# Altium PCB TCRT 16 (PCB2).PcbDoc
Units mm, origin at the board's own origin, x right, y up, seen from the top; angles counter-clockwise.
Board outline 124.42 x 92.49 mm, 2 copper layers (Top Layer, Bottom Layer); 56 components, 44 nets, 238 pads, 27 vias.
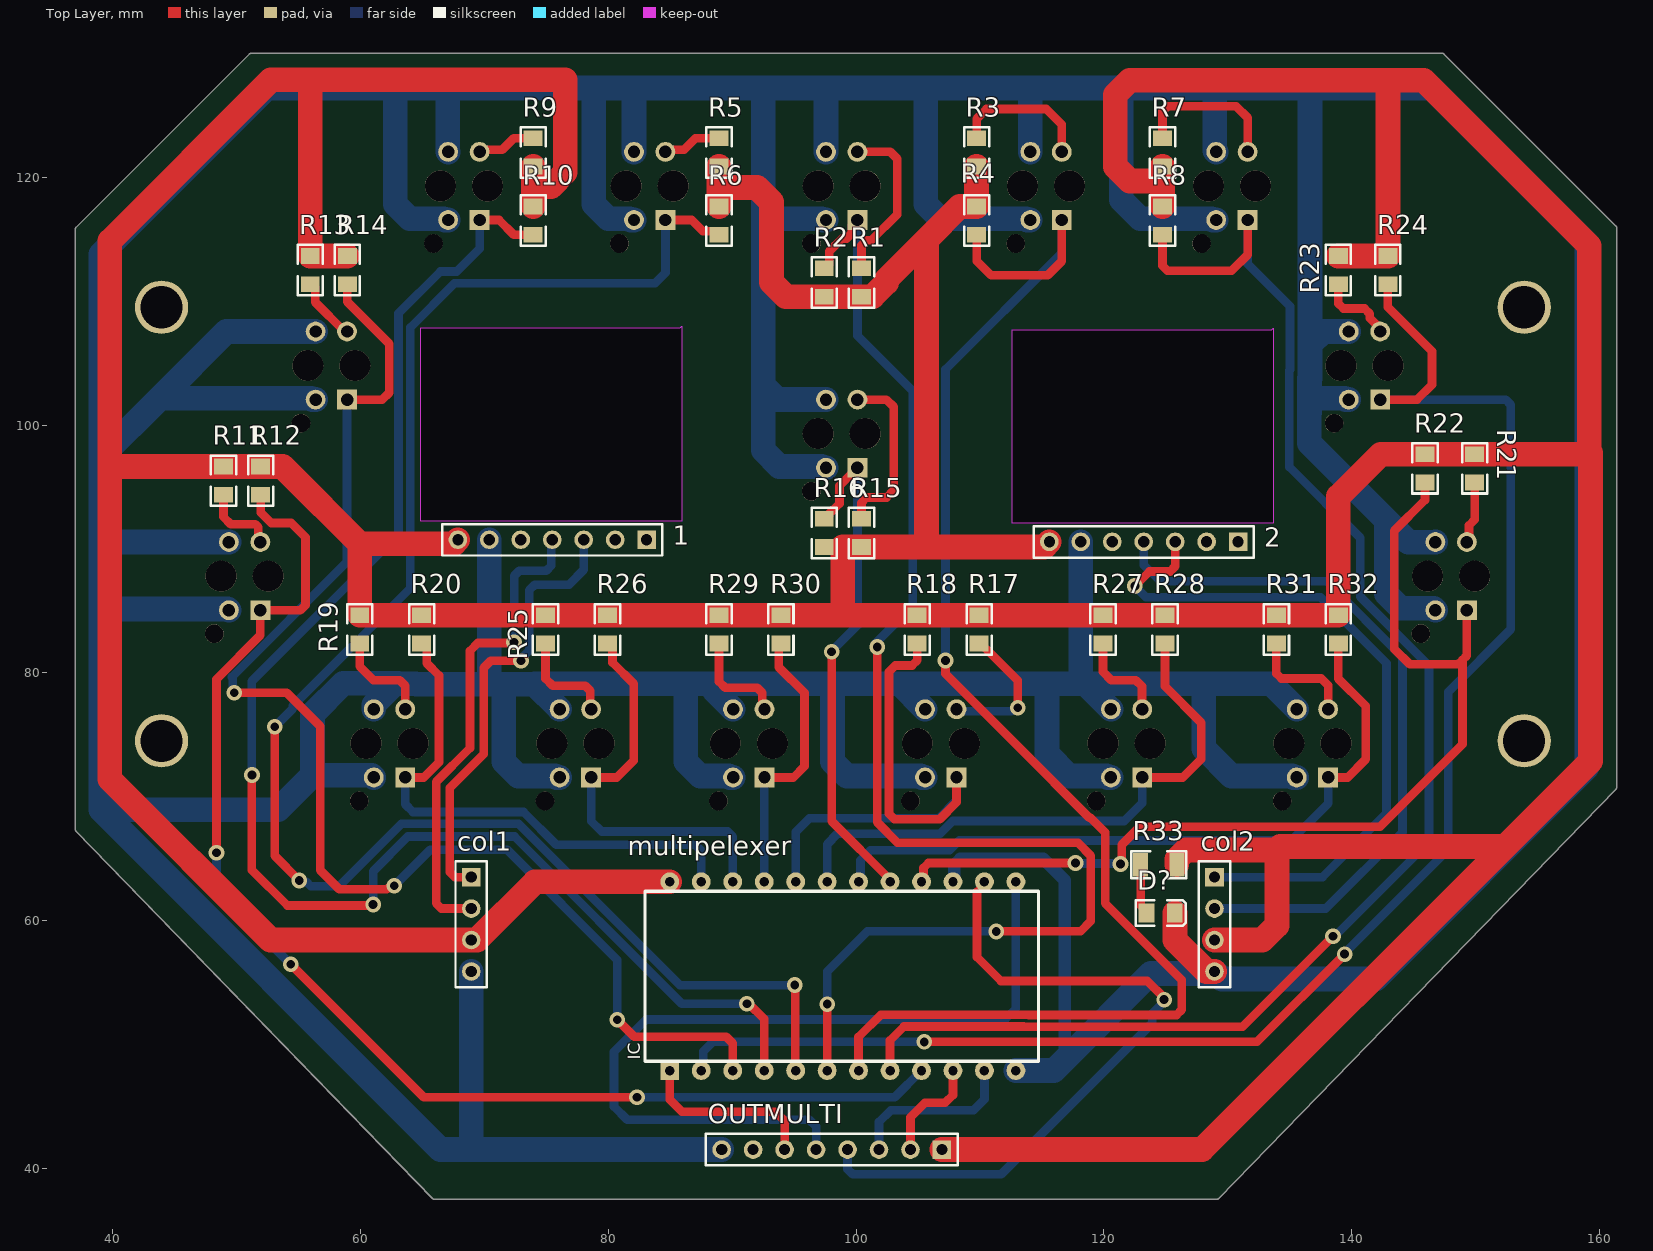
[diagram p0: Top Layer view]
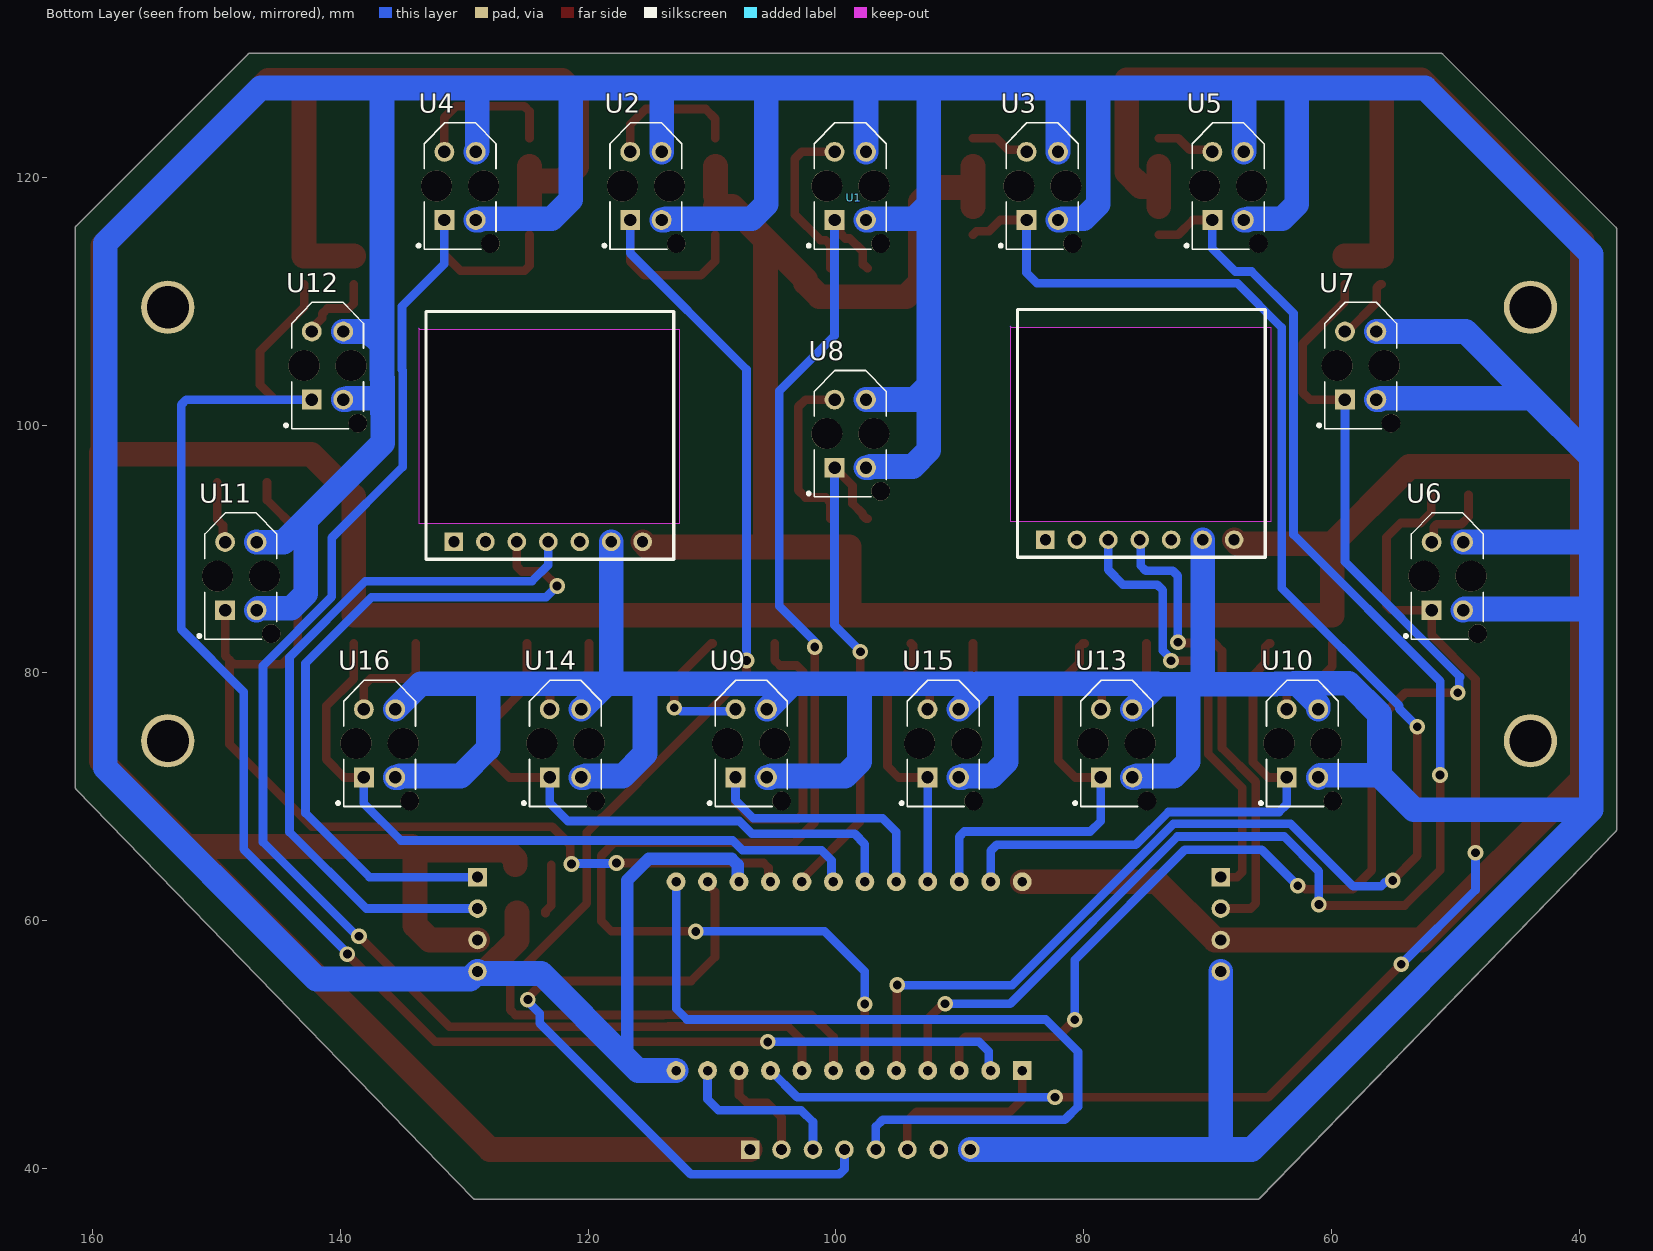
[diagram p1: Bottom Layer view, seen from below]
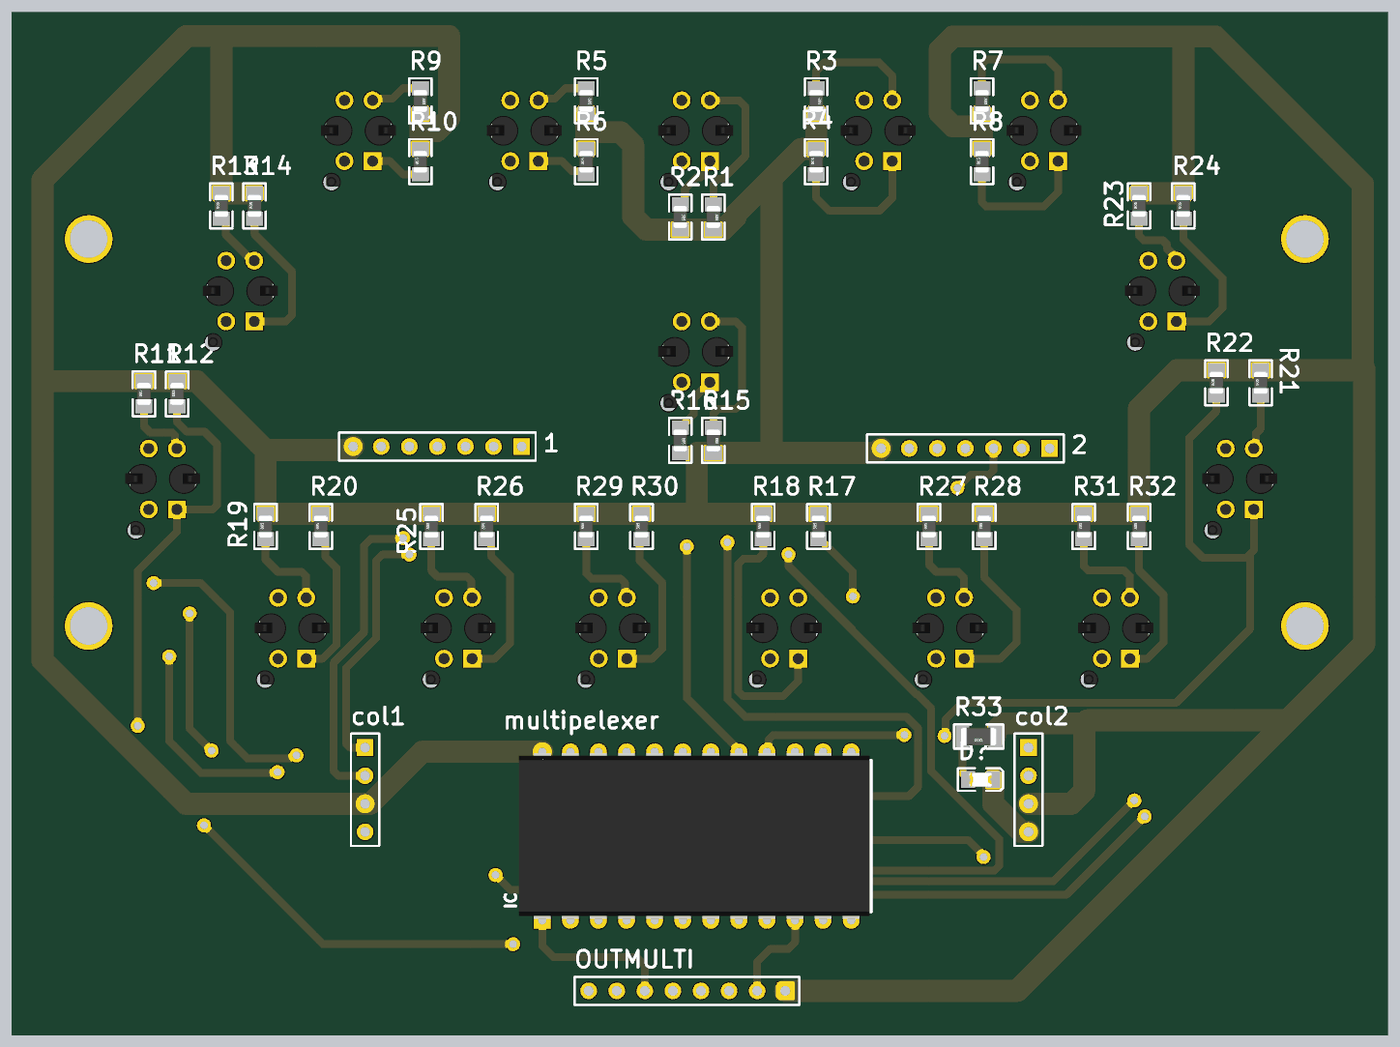
[diagram p2: 3D render of the assembled board from above, using the file's embedded part models]
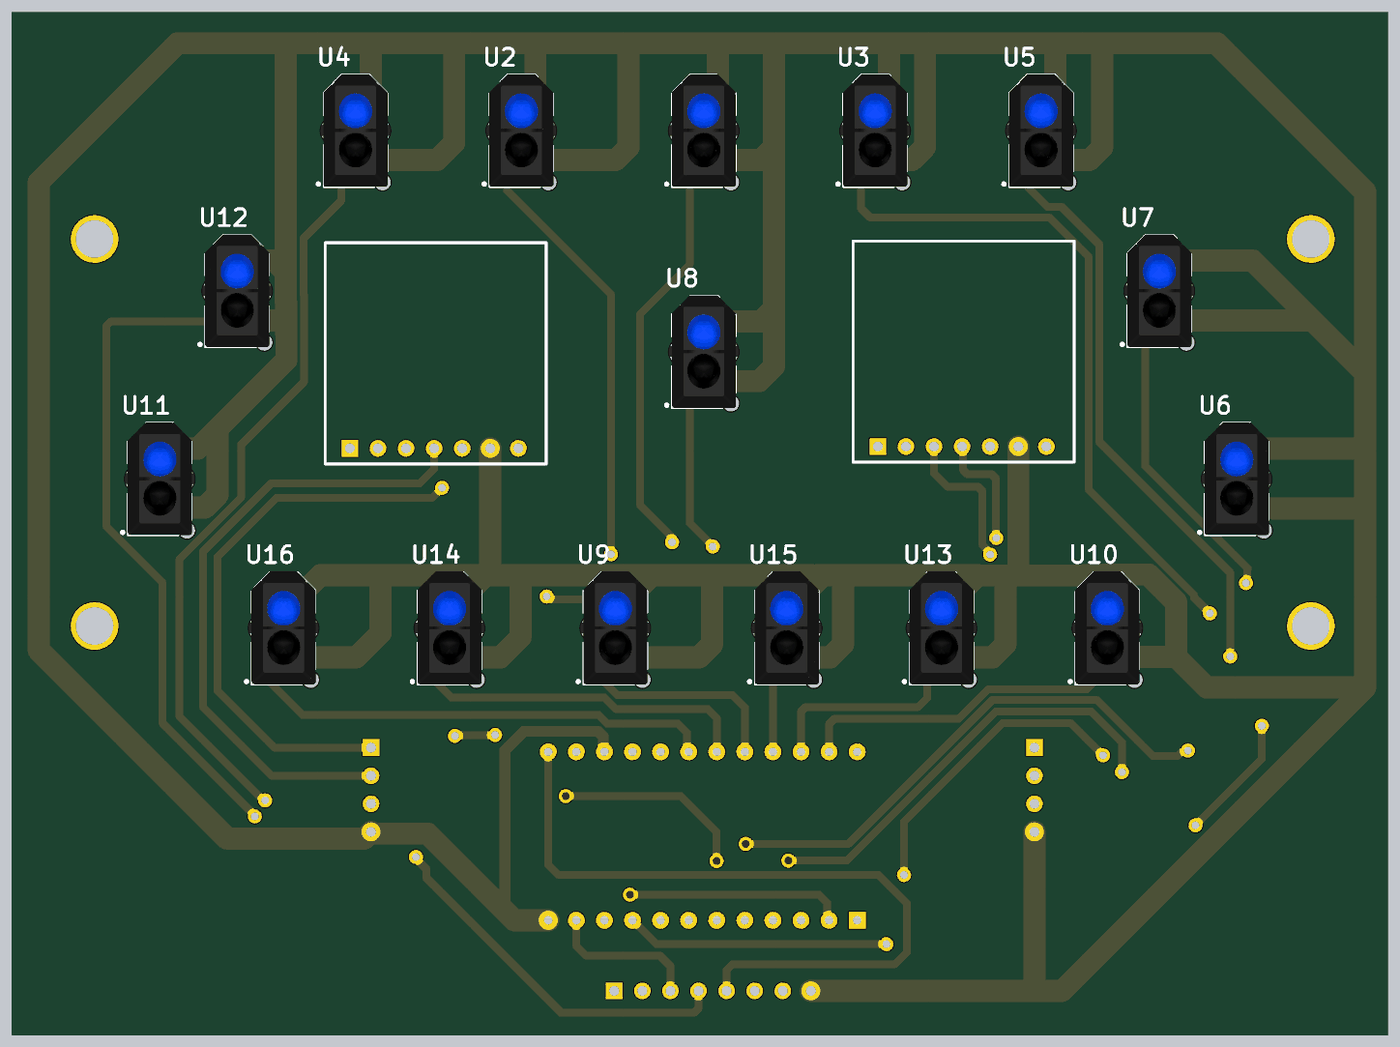
[diagram p3: 3D render of the assembled board from below, using the file's embedded part models]

## Layer stack, top to bottom
Top Solder: solder mask 0.0102, Solder Resist, Dk 3.5
Top Layer: signal copper 0.0356
Dielectric 1: dielectric 0.32, FR-4, Dk 4.8
Bottom Layer: signal copper 0.0356
Bottom Solder: solder mask 0.0102, Solder Resist, Dk 3.5

## Board outline
37.015,67.234 cw(c37.107,67.323) 36.979,67.323 36.979,115.865 cw(c37.107,115.865) 37.017,115.955 51.026,129.964 cw(c51.116,129.874) 51.116,130.002 147.356,130.002 cw(c147.356,129.874) 147.447,129.964 161.357,116.054 161.357,116.053 161.357,116.054 cw(c161.267,115.963) 161.395,115.963 161.395,70.717 cw(c161.267,70.717) 161.359,70.629 129.25,37.547 cw(c129.159,37.635) 129.159,37.508 65.921,37.508 cw(c65.921,37.635) 65.83,37.547
cut-out: 112.602,92.075 112.602,107.696 133.557,107.696 133.684,107.823 133.684,92.075
cut-out: 64.853,92.239 64.853,107.86 85.808,107.86 85.935,107.987 85.935,92.239

## Design rules (kind name [scope] priority, off if disabled: settings)
Clearance [All] p1: gap=0.254 ignorepadtopadclearanceinfootprint=FALSE except(0: Arc-Hole Track-Hole SMDPad-Hole THPad-Hole Via-Hole Fill-Hole Poly-Hole Region-Hole Text-Hole)
PolygonConnect [All] p1: connectstyle=Relief reliefconductorwidth=0.254 reliefentries=4 polygonreliefangle="90 Angle" airgapwidth=0.254
RoutingVias [All] p1: holewidth=0.711 width=1.27 viastyle="Through Hole" minholewidth=0.711 minwidth=1.27 maxholewidth=0.711 maxwidth=1.27
SolderMaskExpansion [All] p1: expansion=0.102 istentingtop=FALSE
Width "Schematic Width Constraint_1" [InNet('VCC')] p1: maxlimit=2 minlimit=2 preferedwidth=2
Width "Schematic Width Constraint" [InNet('GND')] p2: maxlimit=2 minlimit=1 preferedwidth=2 minimp=50.000000 maximp=50.000000 favimp=50.000000
Width [All] p3: maxlimit=0.7 minlimit=0.7 preferedwidth=0.7 minimp=50.000000 maximp=50.000000 favimp=50.000000
30 further rules are at their usual default settings.

## Components (designator, comment, footprint, x,y, rotation, side; value= is the part's Value field where it differs from the comment)
1 "Header 7" HDR1X7 83.093,90.739 r180 top locked
2 "Header 7" HDR1X7 130.842,90.575 r180 top locked
col1 "Header 4" HDR1X4 68.933,63.507 r270 top
col2 "Header 4" HDR1X4 128.933,63.507 r270 top
D? "LED-SMD(0805)" "0805 LED" 124.593,60.613 r0 top
multipelexer "BC4067BE_*" PCBComponent_1 98.933,55.507 r90 top
OUTMULTI "Header 8" HDR1X8 106.933,41.507 r180 top
R1 "150" 0805 100.433,111.507 r270 top
R2 "10K" 0805 97.433,111.507 r270 top
R3 "150" 0805 109.733,122.007 r270 top
R4 "10K" 0805 109.733,116.507 r90 top
R5 "150" 0805 88.933,122.007 r270 top
R6 "10K" 0805 88.933,116.507 r90 top
R7 "150" 0805 124.733,122.007 r270 top
R8 "10K" 0805 124.733,116.507 r90 top
R9 "150" 0805 73.933,122.007 r270 top
R10 "10K" 0805 73.933,116.507 r90 top
R11 "150" 0805 48.933,95.507 r90 top
R12 "10K" 0805 51.933,95.507 r90 top
R13 "150" 0805 55.933,112.507 r90 top
R14 "10K" 0805 58.933,112.507 r90 top
R15 "150" 0805 100.433,91.296 r270 top
R16 "10K" 0805 97.433,91.296 r270 top
R17 "150" 0805 109.933,83.507 r90 top
R18 "10K" 0805 104.933,83.507 r90 top
R19 "150" 0805 59.933,83.507 r90 top
R20 "10K" 0805 64.933,83.507 r90 top
R21 "150" 0805 149.933,96.507 r90 top
R22 "10K" 0805 145.933,96.507 r90 top
R23 "150" 0805 138.933,112.507 r90 top
R24 "10K" 0805 142.933,112.507 r90 top
R25 "150" 0805 74.933,83.507 r90 top
R26 "10K" 0805 79.933,83.507 r90 top
R27 "150" 0805 119.933,83.507 r90 top
R28 "10K" 0805 124.933,83.507 r90 top
R29 "150" 0805 88.933,83.507 r90 top
R30 "10K" 0805 93.933,83.507 r90 top
R31 "150" 0805 133.933,83.507 r90 top
R32 "10K" 0805 138.933,83.507 r90 top
R33 "150" 1206 124.433,64.507 r180 top
U1 "TCRT500" TCRT5000 98.433,119.507 r90 bottom locked
U2 "TCRT500" TCRT5000 114.933,119.507 r90 bottom
U3 "TCRT500" TCRT5000 82.933,119.507 r90 bottom
U4 "TCRT500" TCRT5000 129.933,119.507 r90 bottom
U5 "TCRT500" TCRT5000 67.933,119.507 r90 bottom
U6 "TCRT500" TCRT5000 50.233,88.007 r90 bottom
U7 "TCRT500" TCRT5000 57.233,105.007 r90 bottom
U8 "TCRT500" TCRT5000 98.433,99.507 r90 bottom locked
U9 "TCRT500" TCRT5000 106.433,74.507 r90 bottom
U10 "TCRT500" TCRT5000 61.933,74.507 r90 bottom
U11 "TCRT500" TCRT5000 147.633,88.007 r90 bottom
U12 "TCRT500" TCRT5000 140.633,105.007 r90 bottom
U13 "TCRT500" TCRT5000 76.933,74.507 r90 bottom
U14 "TCRT500" TCRT5000 121.433,74.507 r90 bottom
U15 "TCRT500" TCRT5000 90.933,74.507 r90 bottom
U16 "TCRT500" TCRT5000 136.433,74.507 r90 bottom

## Footprints (in the part's own frame and the unit in brackets; to place one, negate y for a bottom-side part, rotate by r counter-clockwise, add the part's x,y. Pads: shape width x height; smd on the part's side, far side on the other; paste and mask are expansions set on the pad)
0805 [mil]
  rect 50x60 smd: 1(-45,0) 2(45,0)
  silkscreen extent -80,-40 80,40, body extent -39,-25 39,25, height 31
"0805 LED" [mil]
  rect 50x60 smd: 1(-45,0) 2(45,0)
  silkscreen extent -80,-40 80,40, body extent -39,-25 39,25, height 32
1206 [mm]
  rect 1.2x1.9 smd: 1(-1.46,0) 2(1.46,0)
  silkscreen extent -2.22,-1.09 2.22,1.09, body extent -1.59,-0.8 1.61,0.8, height 1
HDR1X4 [mm] "Connector; Header; 4 Position"
  rect 1.5x1.5 hole 0.9: 1(0,0)
  round 1.5 hole 0.9: 2(2.54,0) 3(5.08,0) 4(7.62,0)
  silkscreen extent -1.27,-1.27 8.89,1.27
HDR1X7 [mm] "Connector; Header; 7 Position"
  rect 1.5x1.5 hole 0.9: 1(0,0)
  round 1.5 hole 0.9: 2(2.54,0) 3(5.08,0) 4(7.62,0) 5(10.16,0) 6(12.7,0) 7(15.24,0)
  silkscreen extent -1.27,-1.27 16.51,1.27
HDR1X8 [mm] "Connector; Header; 8 Position"
  rect 1.5x1.5 hole 0.9: 1(0,0)
  round 1.5 hole 0.9: 2(2.54,0) 3(5.08,0) 4(7.62,0) 5(10.16,0) 6(12.7,0) 7(15.24,0) 8(17.78,0)
  silkscreen extent -1.27,-1.27 19.05,1.27
PCBComponent_1 [mil]
  rect 60x60 hole 30 paste+0: 1(-300,550)
  round 60 hole 30 paste+0: 2(-300,450) 3(-300,350) 4(-300,250) 5(-300,150) 6(-300,50) 7(-300,-50) 8(-300,-150) 9(-300,-250) 10(-300,-350) 11(-300,-450) 12(-300,-550) 13(300,-550) 14(300,-450) 15(300,-350) 16(300,-250) 17(300,-150) 18(300,-50) 19(300,50) 20(300,150) 21(300,250) 22(300,350) 23(300,450) 24(300,550)
  silkscreen extent -270,-621 270,629, body extent -295,-616 296,634, height 36
TCRT5000 [mm]
  round 1.6 hole 1: A(2.547,1.676) E(-2.953,-0.864) K(2.547,-0.864)
  rect 1.6x1.6 hole 1: C(-2.953,1.676)
  round 1.5 hole 1.5 unplated: None(-4.853,-2.044)
  round 2.5 hole 2.5 unplated: None(-0.203,-1.494) None(-0.203,2.306)
  silkscreen extent -5.3,-2.49 4.9,3.88, body extent -5.28,-3 4.92,3.8, height 7.2

## Part data
1 2: "Header, 7-Pin", LatestRevisionDate=17-Jul-2002, LatestRevisionNote="Re-released for DXP Platform.", Publisher="Altium Limited"
col1 col2: "Header, 4-Pin", LatestRevisionDate=17-Jul-2002, LatestRevisionNote="Re-released for DXP Platform.", Publisher="Altium Limited"
OUTMULTI: "Header, 8-Pin", LatestRevisionDate=17-Jul-2002, LatestRevisionNote="Re-released for DXP Platform.", Publisher="Altium Limited"
R1 R2 R3 R4 R5 R6 R7 R8 R9 R10 R11 R12 R13 R14 R15 R16 R17 R18 R19 R20 R21 R22 R23 R24 R25 R26 R27 R28 R29 R30 R31 R32 R33: library part RESISTOR_SMD, "Choose your Favorite size from Footprint Section"
U1 U2 U3 U4 U5 U6 U7 U8 U9 U10 U11 U12 U13 U14 U15 U16: library part TCRT5000

## Free pads (board coordinates)
  round 4.3 hole 3.4: 20(43.933,74.507) 20(43.933,109.507) 20(153.933,74.507) 20(153.933,109.507)

## Via types
v1: diameter 1.27, hole 0.711, Top Layer to Bottom Layer, 27 vias

## Nets (pads, with @x,y where several pads share a name; then routed paths per layer and width w, separated by ;. In a path a pad name is that pad's centre, name@x,y a point inside that pad or via, vN(x,y) a via of type N, cw(c..) or ccw(c..) an arc to the next point about the centre after c; other vN are vias at no path point)
A: multipelexer.10 OUTMULTI.2 | length 8.7
  Top Layer w0.7: OUTMULTI.2 104.393,44.111 105.568,45.286 107.187,45.286 107.823,45.922 multipelexer.10
B: multipelexer.11 OUTMULTI.3 | length 13.8
  Bottom Layer w0.7: OUTMULTI.3 101.853,43.736 102.812,44.695 109.482,44.695 110.363,45.576 multipelexer.11
C: multipelexer.14 OUTMULTI.4 | length 56.6
  Top Layer w0.7: multipelexer.14 110.363,62.904 109.764,62.305 109.764,57.054 111.692,55.127 123.504,55.127 124.869,53.761 v1(124.869,53.614)
  Bottom Layer w0.7: OUTMULTI.4 99.313,39.926 99.723,39.516 111.723,39.516 123.906,51.7 123.906,52.496 124.869,53.46 v1(124.869,53.614)
D: multipelexer.13 OUTMULTI.5 | length 67.4
  Bottom Layer w0.7: OUTMULTI.5 96.773,43.372 96.221,43.924 81.526,43.924 80.459,44.991 80.459,49.404 83.067,52.012 112.02,52.012 112.903,52.895 multipelexer.13
GND: 1.6 2.6 col1.4 col2.4 D?.2 multipelexer.12 multipelexer.15 OUTMULTI.8 U1.E U1.K U2.E U2.K U3.E U3.K U4.E U4.K U5.E U5.K U6.E U6.K U7.E U7.K U8.E U8.K U9.E U9.K U10.E U10.K U11.E U11.K U12.E U12.K U13.E U13.K U14.E U14.K U15.E U15.K U16.E U16.K | length 840.9
  Top Layer w2: D?.2 125.736,58.436 128.285,55.887 col2.4
  Bottom Layer w1: multipelexer.15 107.923,63.227 107.923,64.493 108.409,64.979 115.121,64.979 116.838,63.262 116.838,48.77
  Bottom Layer w2: U6.E 49.265,85.158 47.359,85.158 47.342,85.141 39.016,85.141 ; U6.K 39.138,90.554 39.016,90.676 ; U7.E 56.123,102.054 56.019,102.158 43.834,102.158 43.803,102.189 ; U7.K 49.168,107.554 43.803,102.189 ; U10.E 60.902,71.721 56.118,71.721 ; U10.K 61.069,77.419 62.759,79.108 63.069,79.108 ; U5.E 66.823,116.554 66.719,116.658 63.963,116.658 62.791,117.829 62.791,127.22 ; U5.K 67.043,122.08 67.043,127.22 ; col1.4 68.933,41.518 68.922,41.507 ; 1.6 70.393,79.26 70.215,79.081 ; U13.E 75.823,71.554 75.719,71.658 72.727,71.658 71.556,72.829 71.556,79.081 ; U13.K 74.042,79.081 ; U3.E 81.823,116.554 81.719,116.658 79.999,116.658 78.827,117.829 78.827,127.2 78.808,127.22 ; U3.K 82.069,127.162 82.128,127.22 ; 88.569,79.108 86.251,79.108 ; OUTMULTI.8 68.922,41.507 ; U15.E 89.823,71.554 89.719,71.658 87.417,71.658 86.245,72.829 86.245,79.103 86.251,79.108 ; U15.K 88.569,78.554 89.123,79.108 98.094,79.108 ; U8.E 97.323,96.554 97.219,96.658 93.803,96.658 92.5,97.961 92.5,103.225 ; U8.K 93.672,102.054 92.5,103.225 ; U1.E 97.323,116.554 97.219,116.658 93.672,116.658 92.5,117.829 ; U1.K 97.569,127.052 97.738,127.22 ; U9.E 105.323,71.554 105.219,71.658 99.265,71.658 98.094,72.829 98.094,79.108 ; U9.K 103.515,79.108 ; multipelexer.12 115.955,47.887 116.838,48.77 123.801,55.733 128.779,55.733 col2.4 129.543,55.277 141.935,55.277 158.985,72.327 158.985,114.669 146.434,127.22 136.613,127.22 ; U2.E 113.823,116.554 113.719,116.658 106.805,116.658 105.634,117.829 105.634,127.22 ; U2.K 114.069,127.061 113.911,127.22 ; 2.6 118.142,79.481 118.515,79.108 ; U14.E 120.323,71.554 120.219,71.658 117.221,71.658 115.415,73.464 115.415,79.108 ; U14.K 118.515,79.108 ; U4.E 128.823,116.554 128.719,116.658 122.947,116.658 121.406,118.199 121.406,127.22 ; U4.K 128.958,122.165 128.958,127.22 ; U16.E 135.323,71.554 135.219,71.658 130.301,71.658 128.063,73.896 128.063,79.108 ; U16.K 133.515,79.108 128.063,79.108 ; 136.61,103.767 136.61,102.022 ; 136.635,103.767 136.635,106.482 ; U12.E 139.523,102.054 139.419,102.158 136.747,102.158 136.61,102.022 ; U12.K 137.708,107.554 136.635,106.482 ; 142.8,92.341 136.585,98.556 136.585,100.984 136.61,101.009 136.61,102.022 ; U11.E 146.612,85.211 143.971,85.211 142.8,86.383 142.8,92.346 144.599,90.546 146.762,90.546 U11.K ; 39.016,68.941 66.45,41.507 68.922,41.507 ; 39.016,68.941 53.337,68.941 56.118,71.721 ; 39.016,68.941 39.016,85.141 ; 39.016,85.141 39.016,90.676 ; 39.016,90.676 39.016,97.402 ; 39.016,97.402 43.803,102.189 ; 39.016,97.402 39.016,113.782 52.454,127.22 62.791,127.22 ; 56.118,71.721 56.118,76.67 58.61,79.163 63.014,79.163 63.069,79.108 ; 62.791,127.22 67.043,127.22 ; 63.069,79.108 64.46,79.108 64.487,79.081 70.215,79.081 ; 67.043,127.22 78.808,127.22 ; 70.215,79.081 71.556,79.081 ; 71.556,79.081 74.042,79.081 ; 74.042,79.081 74.068,79.108 86.251,79.108 ; 78.808,127.22 82.128,127.22 ; 82.128,127.22 92.5,127.22 ; 92.5,103.225 92.5,117.829 ; 92.5,117.829 92.5,127.22 ; 92.5,127.22 97.738,127.22 ; 97.738,127.22 105.634,127.22 ; 98.094,79.108 103.515,79.108 ; 103.515,79.108 115.415,79.108 ; 105.634,127.22 113.911,127.22 ; 113.911,127.22 121.406,127.22 ; 115.415,79.108 118.515,79.108 ; 118.515,79.108 128.063,79.108 ; 121.406,127.22 128.958,127.22 ; 128.958,127.22 136.613,127.22 ; 136.613,127.22 136.635,127.198 136.635,106.482
NetD?_1: D?.1 R33.2 | length 4.1
  Top Layer w0.7: R33.2 122.972,61.218 123.45,60.74 D?.1
NetR1_1: R1.1 U1.A | length 13.7
  Top Layer w0.7: U1.A 102.755,122.054 103.321,121.488 103.321,116.999 101.252,114.931 100.843,114.931 100.433,114.521 R1.1
NetR3_1: R3.1 U2.A | length 11.5
  Top Layer w0.7: R3.1 109.733,124.716 110.527,125.51 115.355,125.51 116.609,124.256 U2.A
NetR5_1: R5.1 U3.A | length 4.8
  Top Layer w0.7: U3.A 84.782,122.226 86.109,122.226 87.033,123.15 R5.1
NetR7_1: R7.1 U4.A | length 12.3
  Top Layer w0.7: R7.1 124.733,125.308 125.161,125.737 130.673,125.737 131.609,124.8 U4.A
NetR9_1: R9.1 U5.A | length 4.8
  Top Layer w0.7: U5.A 69.614,122.049 69.791,122.226 71.44,122.226 72.364,123.15 R9.1
NetR11_1: R11.1 U6.A | length 6.2
  Top Layer w0.7: R11.1 48.933,92.585 49.519,92 51.499,92 51.737,91.762 51.737,90.726 U6.A
NetR13_1: R13.1 U7.A | length 5.2
  Top Layer w0.7: R13.1 56.06,111.364 56.345,111.079 56.345,109.904 58.695,107.554 U7.A
NetR15_1: R15.1 U8.A | length 14.2
  Top Layer w0.7: U8.A 102.445,102.054 103.032,101.468 103.032,94.727 102.452,94.147 100.843,94.147 100.433,93.737 R15.1
NetR17_1: R17.1 U9.A | length 11.7
  Top Layer w0.7: R17.1 110.06,82.364 113.052,79.372 v1(113.052,77.176)
  Bottom Layer w0.7: U9.A 108.269,76.894 112.536,76.894 112.709,77.067 112.943,77.067 v1(113.052,77.176)
NetR19_1: R19.1 U10.A | length 8.1
  Top Layer w0.7: R19.1 59.933,80.516 61.045,79.404 63.171,79.404 63.609,78.965 U10.A
NetR21_1: R21.1 U11.A | length 5.1
  Top Layer w0.7: U11.A 149.482,90.726 149.482,91.899 149.933,92.35 R21.1
NetR23_1: R23.1 U12.A | length 6.2
  Top Layer w0.7: R23.1 138.933,109.816 139.343,109.406 141.05,109.406 141.46,108.996 141.46,108.646 142.309,107.797 U12.A
NetR25_1: R25.1 U13.A | length 8.7
  Top Layer w0.7: R25.1 74.933,79.531 75.51,78.954 78.135,78.954 78.545,78.544 78.545,77.47 78.653,77.47 78.47,77.286 78.377,77.286 78.57,77.093 78.609,77.093 U13.A
NetR27_1: R27.1 U14.A | length 7.8
  Top Layer w0.7: R27.1 119.933,80.077 120.606,79.404 122.583,79.404 123.083,78.904 123.083,77.08 U14.A
NetR29_1: R29.1 U15.A | length 8.4
  Top Layer w0.7: R29.1 88.933,79.298 89.436,78.795 92.027,78.795 92.437,78.385 92.437,77.226 U15.A
NetR31_1: R31.1 U16.A | length 9
  Top Layer w0.7: R31.1 133.933,79.948 134.343,79.538 137.551,79.538 138.109,78.979 138.109,77.165 138.165,77.11 U16.A
OUT1: multipelexer.6 R2.1 U1.C | length 111.3
  Top Layer w0.7: R2.1 97.458,112.65 97.743,112.935 97.845,112.935 97.845,114.035 98.874,115.064 99.249,115.064 99.659,115.474 99.659,116.104 U1.C ; multipelexer.6 97.663,53.238 v1(97.676,53.251) ; v1(101.706,82.081) 101.706,67.925 103.349,66.281 117.911,66.281 118.951,65.242 118.951,59.962 118.113,59.124 v1(111.317,59.124)
  Bottom Layer w0.7: v1(97.676,53.251) 97.676,55.89 100.91,59.124 v1(111.317,59.124) ; U1.C 100.109,107.22 104.579,102.751 104.579,85.398 v1@101.609,82.428
OUT2: multipelexer.7 R4.1 U2.C | length 118.6
  Top Layer w0.7: multipelexer.7 100.203,50.593 102.009,52.399 113.926,52.399 113.95,52.375 125.867,52.375 126.301,52.809 126.301,55.207 120.104,61.404 120.104,67.123 118.927,68.3 118.829,68.3 113.027,74.101 113.027,74.122 107.225,79.923 v1(107.225,80.997) ; R4.1 109.733,113.25 110.9,112.084 115.468,112.084 116.609,113.225 U2.C
  Bottom Layer w0.7: v1(107.225,80.997) 107.225,104.48 116.609,113.864 U2.C
OUT3: multipelexer.5 R6.1 U3.C | length 136.1
  Top Layer w0.7: v1(53.068,75.649) 53.068,65.222 v1(55.055,63.236) ; U3.C 86.737,116.554 87.642,115.649 88.648,115.649 R6.1 ; v1(95.047,54.797) 95.085,54.759 95.085,47.925 multipelexer.5
  Bottom Layer w0.7: v1(53.068,75.649) 54.514,77.094 54.514,77.334 64.021,86.842 64.021,107.882 67.587,111.448 83.769,111.448 84.609,112.289 U3.C ; v1(55.055,63.236) 55.164,63.127 55.625,63.127 55.995,62.757 58.247,62.757 63.3,67.809 72.751,67.809 85.784,54.776 95.027,54.776 v1(95.047,54.797)
OUT4: multipelexer.8 R8.1 U4.C | length 121.5
  Top Layer w0.7: multipelexer.8 102.743,50.32 103.868,51.445 113.531,51.445 113.555,51.421 131.195,51.421 v1(138.505,58.731) ; R8.1 124.733,112.857 125.143,112.447 130.315,112.447 131.609,113.742 U4.C
  Bottom Layer w0.7: U4.C 131.609,113.007 135.031,109.585 135.031,104.456 134.981,104.406 134.981,96.605 140.692,90.895 140.692,86.136 146.25,80.578 146.25,66.339 v1@138.778,58.867
OUT5: multipelexer.4 R10.1 U5.C | length 122.4
  Top Layer w0.7: v1(51.226,71.748) 51.226,64.085 54.097,61.214 60.938,61.214 v1(61.015,61.29) ; U5.C 71.169,116.554 72.359,115.364 R10.1 ; v1(91.184,53.29) 91.338,53.29 92.583,52.045 multipelexer.4
  Bottom Layer w0.7: v1(51.226,71.748) 51.226,79.323 63.067,91.165 63.067,109.018 66.452,112.402 67.753,112.402 69.609,114.259 U5.C ; v1(61.015,61.29) 61.015,63.981 63.818,66.784 72.427,66.784 85.921,53.29 v1(91.184,53.29)
OUT6: multipelexer.9 R12.1 U6.C | length 104
  Top Layer w0.7: v1(48.368,65.474) 48.368,79.484 51.909,83.026 U6.C 55.143,85.054 55.553,85.464 55.553,90.945 54.401,92.097 52.783,92.097 51.933,92.947 R12.1 ; v1(54.363,56.478) 65.109,45.731 v1(82.318,45.731)
  Bottom Layer w0.7: v1(48.368,65.474) 48.368,62.473 v1(54.363,56.478) ; v1(82.318,45.731) 103.127,45.731 multipelexer.9
OUT7: multipelexer.3 R14.1 U7.C | length 107.8
  Top Layer w0.7: v1(49.801,78.395) 54.042,78.395 56.742,75.695 56.742,64.067 58.28,62.529 62.118,62.529 62.286,62.698 62.614,62.698 v1(62.723,62.807) ; U7.C 61.751,102.054 62.306,102.609 62.306,106.574 58.933,109.947 R14.1 ; v1(80.728,51.987) 82.092,50.622 89.524,50.622 90.043,50.103 multipelexer.3
  Bottom Layer w0.7: v1(49.801,78.395) 49.692,78.504 49.692,79.596 49.621,79.667 58.909,88.955 U7.C ; v1(62.723,62.807) 65.625,65.709 71.841,65.709 80.728,56.822 v1(80.728,51.987)
OUT8: multipelexer.17 R16.1 U8.C | length 41.3
  Top Layer w0.7: R16.1 97.56,92.439 97.845,92.724 97.845,92.851 98.661,93.667 98.661,95.106 U8.C ; v1(98.026,81.696) 97.909,81.696 98.026,81.578 98.026,68.025 102.743,63.308 multipelexer.17
  Bottom Layer w0.7: v1@98.261,81.989 100.109,83.838 U8.C
OUT9: multipelexer.20 R18.1 U9.C | length 43.6
  Top Layer w0.7: R18.1 104.933,81 104.523,80.59 103.16,80.59 102.66,80.089 102.66,68.63 103.109,68.18 106.747,68.18 108.109,69.543 U9.C
  Bottom Layer w0.7: multipelexer.20 95.123,67.145 96.225,68.247 106.652,68.247 108.109,69.704 U9.C
OUT10: multipelexer.23 R20.1 U10.C | length 43.6
  Top Layer w0.7: U10.C 65.106,71.554 66.333,72.781 66.333,79.78 65.345,80.768 65.345,82.079 65.06,82.364 R20.1
  Bottom Layer w0.7: U10.C 63.609,69.38 64.226,68.763 73.146,68.763 75.792,66.117 87.02,66.117 87.503,65.634 multipelexer.23
OUT11: multipelexer.16 R22.1 U11.C | length 81.3
  Top Layer w0.7: multipelexer.16 105.441,63.285 105.441,64.239 105.851,64.649 v1(117.712,64.649) ; v1(121.343,64.568) 121.452,64.677 121.452,66.115 122.91,67.573 142.301,67.573 148.962,74.234 148.962,80.687 148.962,81.035 ; R22.1 145.933,93.951 143.449,91.467 143.449,81.925 144.687,80.687 148.615,80.687 148.962,81.035 ; U11.C 149.309,81.382 148.962,81.035
  Bottom Layer w0.7: v1(117.712,64.649) 117.752,64.609 121.302,64.609 v1(121.343,64.568)
OUT12: multipelexer.2 R24.1 U12.C | length 131.7
  Top Layer w0.7: v1(105.51,50.206) 132.36,50.206 v1(139.442,57.288) ; U12.C 145.286,102.054 146.493,103.261 146.493,105.949 142.933,109.51 R24.1
  Bottom Layer w0.7: multipelexer.2 87.661,48.045 87.661,49.422 88.445,50.206 v1(105.51,50.206) ; v1@139.229,57.166 147.817,65.754 147.817,78.461 152.861,83.506 152.861,101.644 152.451,102.054 U12.C
OUT13: multipelexer.22 R26.1 U13.C | length 33.5
  Top Layer w0.7: U13.C 80.684,71.554 82.051,72.921 82.051,79.113 80.336,80.827 80.336,82.079 80.051,82.364 R26.1
  Bottom Layer w0.7: U13.C 78.609,68.041 79.469,67.182 89.633,67.182 90.043,66.772 multipelexer.22
OUT14: multipelexer.19 R28.1 U14.C | length 47.8
  Top Layer w0.7: U14.C 126.38,71.554 127.871,73.045 127.871,75.97 124.933,78.908 R28.1
  Bottom Layer w0.7: multipelexer.19 97.663,66.17 98.49,66.997 106.778,66.997 107.816,68.034 121.656,68.034 123.109,69.488 U14.C
OUT15: multipelexer.21 R30.1 U15.C | length 22.9
  Top Layer w0.7: U15.C 94.941,71.554 95.832,72.445 95.832,78.382 93.768,80.446 93.768,82.199 R30.1
  Bottom Layer w0.7: multipelexer.21 92.596,63.14 92.596,71.541 U15.C
OUT16: multipelexer.18 R32.1 U16.C | length 57.5
  Top Layer w0.7: U16.C 139.686,71.554 141.148,73.016 141.148,77.315 138.933,79.53 R32.1
  Bottom Layer w0.7: multipelexer.18 100.361,63.285 100.361,64.865 101.162,65.667 107.536,65.667 108.326,66.458 135.111,66.458 138.109,69.456 U16.C
OUTPUT: multipelexer.1 OUTMULTI.6 | length 14.8
  Top Layer w0.7: multipelexer.1 84.963,45.546 85.941,44.568 93.483,44.568 94.233,43.818 94.233,41.793 94.376,41.65 OUTMULTI.6
SCL0: 1.4 col1.2 | length 39.2
  Top Layer w0.7: col1.2 66.517,60.967 66.1,61.384 66.1,71.199 68.829,73.928 68.829,81.762 69.467,82.4 72.321,82.4 v1(72.385,82.464)
  Bottom Layer w0.7: v1(72.385,82.464) 72.405,82.484 72.405,87.835 72.815,88.245 74.995,88.245 75.405,88.655 75.405,90.671 1.4
SCL1: 2.4 col2.2 | length 57.8
  Bottom Layer w0.7: 2.4 123.222,88.708 124.527,87.402 137.972,87.402 144.109,81.265 144.109,67.152 137.924,60.967 129.171,60.967 129.052,60.848 col2.2
SDA0: 1.3 col1.1 | length 36.3
  Top Layer w0.7: col1.1 67.608,63.507 67.198,63.917 67.198,70.695 69.94,73.437 69.94,80.411 70.5,80.97 v1(72.943,80.97)
  Bottom Layer w0.7: v1(72.943,80.97) 72.943,81.125 73.624,81.806 73.624,86.676 74.067,87.119 76.82,87.119 78.013,88.312 78.013,90.517 77.902,90.628 1.3
SDA1: 2.3 col2.1 | length 56.9
  Top Layer w0.7: v1(122.507,87.009) 123.679,88.181 125.352,88.181 125.762,88.591 2.3
  Bottom Layer w0.7: v1(122.507,87.009) 123.411,86.105 137.494,86.105 142.825,80.773 142.825,68.679 137.653,63.507 col2.1
VCC: 1.7 2.7 col1.3 col2.3 multipelexer.24 OUTMULTI.1 R1.2 R2.2 R3.2 R4.2 R5.2 R6.2 R7.2 R8.2 R9.2 R10.2 R11.2 R12.2 R13.2 R14.2 R15.2 R16.2 R17.2 R18.2 R19.2 R20.2 R21.2 R22.2 R23.2 R24.2 R25.2 R26.2 R27.2 R28.2 R29.2 R30.2 R31.2 R32.2 R33.1 | length 621.9
  Top Layer w2: R14.2 R13.2 55.933,127.693 56.112,127.872 ; 1.7 67.537,90.422 59.933,90.422 ; R10.2 73.933,119.257 ; R9.2 73.933,119.257 ; multipelexer.24 74.09,63.127 69.39,58.427 52.729,58.427 39.753,71.403 39.753,96.472 ; R6.2 88.933,119.175 ; R5.2 88.933,119.175 ; 105.688,90.575 105.688,114.964 ; OUTMULTI.1 127.918,41.507 152.381,65.969 ; R4.2 108.374,117.65 105.688,114.964 ; 109.733,118.533 R3.2 ; 2.7 115.18,90.153 98.933,90.153 98.933,84.898 99.181,84.65 ; R8.2 124.733,119.62 ; R7.2 124.733,119.62 ; R33.1 125.893,64.956 126.642,65.704 133.97,65.704 ; col2.3 132.799,58.427 133.97,59.599 133.97,65.704 ; R23.2 R24.2 142.933,127.75 143.014,127.831 ; 39.753,96.472 39.753,114.851 52.773,127.872 56.112,127.872 ; 39.753,96.472 39.931,96.65 R11.2 R12.2 53.705,96.65 54.102,96.253 59.933,90.422 ; 56.112,127.872 76.528,127.872 76.528,120.414 75.371,119.257 73.933,119.257 ; 59.933,90.422 R19.2 R20.2 R25.2 R26.2 R29.2 R30.2 99.181,84.65 ; 88.933,119.175 92.005,119.175 93.177,118.003 93.177,111.536 94.348,110.364 R2.2 R1.2 101.317,110.364 102.449,111.496 102.449,111.725 105.688,114.964 ; 99.181,84.65 R18.2 R17.2 R27.2 R28.2 R31.2 R32.2 138.933,94.222 142.361,97.65 R21.2 159.18,97.65 ; 124.733,119.62 124.657,119.695 122.088,119.695 120.916,120.867 120.916,126.659 122.088,127.831 143.014,127.831 ; 133.97,65.704 134.235,65.969 152.381,65.969 ; 143.014,127.831 145.824,127.831 159.18,114.474 159.18,97.65 ; 152.381,65.969 159.297,72.886 159.297,97.767 159.18,97.65
pads on no net: 1.1 1.2 1.5 2.1 2.2 2.5 OUTMULTI.7 U1.None U2.None U3.None U4.None U5.None U6.None U7.None U8.None U9.None U10.None U11.None U12.None U13.None U14.None U15.None U16.None

## Silkscreen, mask and mechanical layers (free items; w line width, h text height)
Bottom Overlay:
  lines w0.254: 65.339,89.333 85.339,89.333 85.339,109.333 65.339,109.333 65.339,89.333 ; 113.088,89.169 133.088,89.169 133.088,109.169 113.088,109.169 113.088,89.169
Mechanical 1:
  lines w0.254: 37.107,67.323 65.921,37.635 129.159,37.635 161.267,70.717 161.267,115.963 147.356,129.874 51.116,129.874 37.107,115.865 37.107,67.323

## Text inside footprints (layer, text, board x,y; h text height)
multipelexer: Top Overlay "IC" at 82.582,48.774 h1 r90